# Altium PCB PCB1.PcbDoc (part 3 of 6)
Units mm, origin at the board's own origin, x right, y up, seen from the top; angles counter-clockwise.
Board outline 1473.2 x 504.06 mm, 4 copper layers (Top Layer, MidLayer1, MidLayer2, Bottom Layer); 162 components, 222 nets, 4894 pads, 2213 vias.
Unrouted connection lines stored in the file: 216.
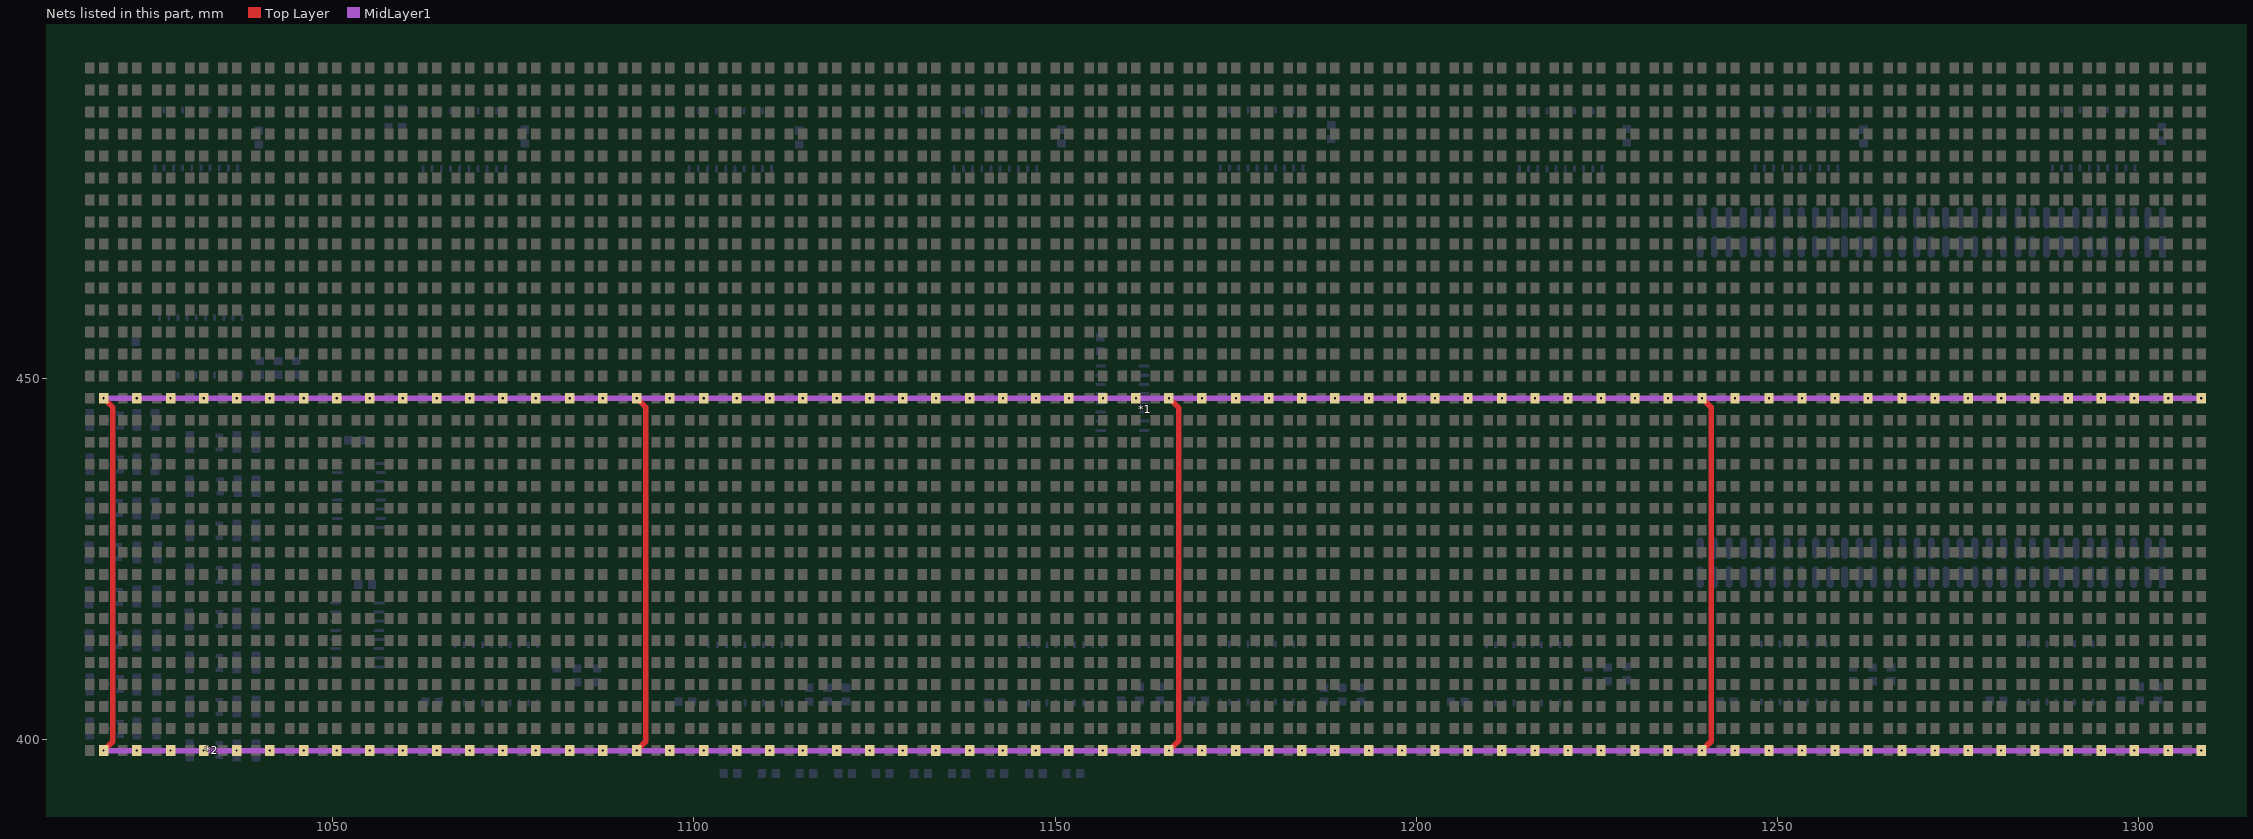
[diagram p5: the nets of this part, all layers, seen from the top]

## Footprints (in the part's own frame and the unit in brackets; to place one, negate y for a bottom-side part, rotate by r counter-clockwise, add the part's x,y. Pads: shape width x height; smd on the part's side, far side on the other; paste and mask are expansions set on the pad) (continued)
LED_3264 [mm] (continued)
  rect 1.3x1.5 smd: 75(-134.879,-64.389) 75(-134.879,-15.621) 75(-130.307,-64.389) 75(-130.307,-15.621) 75(-125.735,-64.389) 75(-125.735,-15.621) 75(-121.163,-64.389) 75(-121.163,-15.621) 75(-116.464,-64.389) 75(-116.464,-15.621) 75(-111.892,-64.389) 75(-111.892,-15.621) 75(-107.32,-64.389) 75(-107.32,-15.621) 75(-102.748,-64.389) 75(-102.748,-15.621) 75(-98.049,-64.389) 75(-98.049,-15.621) 75(-93.477,-64.389) 75(-93.477,-15.621) 75(-88.905,-64.389) 75(-88.905,-15.621) 75(-84.333,-64.389) 75(-84.333,-15.621) 75(-79.634,-64.389) 75(-79.634,-15.621) 75(-75.062,-64.389) 75(-75.062,-15.621) 75(-70.49,-64.389) 75(-70.49,-15.621) 75(-65.918,-64.389) 75(-65.918,-15.621) 75(-61.219,-64.389) 75(-61.219,-15.621) 75(-56.647,-64.389) 75(-56.647,-15.621) 75(-51.948,-64.389) 75(-51.948,-15.621) 75(-47.376,-64.389) 75(-47.376,-15.621) 75(-42.677,-64.389) 75(-42.677,-15.621) 75(-38.105,-64.389) 75(-38.105,-15.621) 75(-33.533,-64.389) 75(-33.533,-15.621) 75(-28.961,-64.389) 75(-28.961,-15.621) 75(-24.262,-64.389) 75(-24.262,-15.621) 75(-19.69,-64.389) 75(-19.69,-15.621) 75(-15.118,-64.389) 75(-15.118,-15.621) 75(-10.546,-64.389) 75(-10.546,-15.621) 75(-5.847,-64.389) 75(-5.847,-15.621) 75(-1.275,-64.389) 75(-1.275,-15.621) 75(3.297,-64.389) 75(3.297,-15.621) 75(7.869,-64.389) 75(7.869,-15.621) 75(12.568,-64.389) 75(12.568,-15.621) 75(17.14,-64.389) 75(17.14,-15.621) 76(-273.182,-61.341) 76(-273.182,-12.573) 76(-268.61,-61.341) 76(-268.61,-12.573) 76(-263.911,-61.341) 76(-263.911,-12.573) 76(-259.339,-61.341) 76(-259.339,-12.573) 76(-254.767,-61.341) 76(-254.767,-12.573) 76(-250.195,-61.341) 76(-250.195,-12.573) 76(-245.496,-61.341) 76(-245.496,-12.573) 76(-240.924,-61.341) 76(-240.924,-12.573) 76(-236.352,-61.341) 76(-236.352,-12.573) 76(-231.78,-61.341) 76(-231.78,-12.573) 76(-227.081,-61.341) 76(-227.081,-12.573) 76(-222.509,-61.341) 76(-222.509,-12.573) 76(-217.937,-61.341) 76(-217.937,-12.573) 76(-213.365,-61.341) 76(-213.365,-12.573) 76(-208.666,-61.341) 76(-208.666,-12.573) 76(-204.094,-61.341) 76(-204.094,-12.573) 76(-199.395,-61.341) 76(-199.395,-12.573) 76(-194.823,-61.341) 76(-194.823,-12.573) 76(-190.124,-61.341) 76(-190.124,-12.573) 76(-185.552,-61.341) 76(-185.552,-12.573) 76(-180.98,-61.341) 76(-180.98,-12.573) 76(-176.408,-61.341) 76(-176.408,-12.573) 76(-171.709,-61.341) 76(-171.709,-12.573) 76(-167.137,-61.341) 76(-167.137,-12.573) 76(-162.565,-61.341) 76(-162.565,-12.573) 76(-157.993,-61.341) 76(-157.993,-12.573) 76(-153.294,-61.341) 76(-153.294,-12.573) 76(-148.722,-61.341) 76(-148.722,-12.573) 76(-144.15,-61.341) 76(-144.15,-12.573) 76(-139.578,-61.341) 76(-139.578,-12.573) 76(-134.879,-61.341) 76(-134.879,-12.573) 76(-130.307,-61.341) 76(-130.307,-12.573) 76(-125.735,-61.341) 76(-125.735,-12.573) 76(-121.163,-61.341) 76(-121.163,-12.573) 76(-116.464,-61.341) 76(-116.464,-12.573) 76(-111.892,-61.341) 76(-111.892,-12.573) 76(-107.32,-61.341) 76(-107.32,-12.573) 76(-102.748,-61.341) 76(-102.748,-12.573) 76(-98.049,-61.341) 76(-98.049,-12.573) 76(-93.477,-61.341) 76(-93.477,-12.573) 76(-88.905,-61.341) 76(-88.905,-12.573) 76(-84.333,-61.341) 76(-84.333,-12.573) 76(-79.634,-61.341) 76(-79.634,-12.573) 76(-75.062,-61.341) 76(-75.062,-12.573) 76(-70.49,-61.341) 76(-70.49,-12.573) 76(-65.918,-61.341) 76(-65.918,-12.573) 76(-61.219,-61.341) 76(-61.219,-12.573) 76(-56.647,-61.341) 76(-56.647,-12.573) 76(-51.948,-61.341) 76(-51.948,-12.573) 76(-47.376,-61.341) 76(-47.376,-12.573) 76(-42.677,-61.341) 76(-42.677,-12.573) 76(-38.105,-61.341) 76(-38.105,-12.573) 76(-33.533,-61.341) 76(-33.533,-12.573) 76(-28.961,-61.341) 76(-28.961,-12.573) 76(-24.262,-61.341) 76(-24.262,-12.573) 76(-19.69,-61.341) 76(-19.69,-12.573) 76(-15.118,-61.341) 76(-15.118,-12.573) 76(-10.546,-61.341) 76(-10.546,-12.573) 76(-5.847,-61.341) 76(-5.847,-12.573) 76(-1.275,-61.341) 76(-1.275,-12.573) 76(3.297,-61.341) 76(3.297,-12.573) 76(7.869,-61.341) 76(7.869,-12.573) 76(12.568,-61.341) 76(12.568,-12.573) 76(17.14,-61.341) 76(17.14,-12.573) 77(-273.182,-58.293) 77(-273.182,-9.525) 77(-268.61,-58.293) 77(-268.61,-9.525) 77(-263.911,-58.293) 77(-263.911,-9.525) 77(-259.339,-58.293) 77(-259.339,-9.525) 77(-254.767,-58.293) 77(-254.767,-9.525) 77(-250.195,-58.293) 77(-250.195,-9.525) 77(-245.496,-58.293) 77(-245.496,-9.525) 77(-240.924,-58.293) 77(-240.924,-9.525) 77(-236.352,-58.293) 77(-236.352,-9.525) 77(-231.78,-58.293) 77(-231.78,-9.525) 77(-227.081,-58.293) 77(-227.081,-9.525) 77(-222.509,-58.293) 77(-222.509,-9.525) 77(-217.937,-58.293) 77(-217.937,-9.525) 77(-213.365,-58.293) 77(-213.365,-9.525) 77(-208.666,-58.293) 77(-208.666,-9.525) 77(-204.094,-58.293) 77(-204.094,-9.525) 77(-199.395,-58.293) 77(-199.395,-9.525) 77(-194.823,-58.293) 77(-194.823,-9.525) 77(-190.124,-58.293) 77(-190.124,-9.525) 77(-185.552,-58.293) 77(-185.552,-9.525) 77(-180.98,-58.293) 77(-180.98,-9.525) 77(-176.408,-58.293) 77(-176.408,-9.525) 77(-171.709,-58.293) 77(-171.709,-9.525) 77(-167.137,-58.293) 77(-167.137,-9.525) 77(-162.565,-58.293) 77(-162.565,-9.525) 77(-157.993,-58.293) 77(-157.993,-9.525) 77(-153.294,-58.293) 77(-153.294,-9.525) 77(-148.722,-58.293) 77(-148.722,-9.525) 77(-144.15,-58.293) 77(-144.15,-9.525) 77(-139.578,-58.293) 77(-139.578,-9.525) 77(-134.879,-58.293) 77(-134.879,-9.525) 77(-130.307,-58.293) 77(-130.307,-9.525) 77(-125.735,-58.293) 77(-125.735,-9.525) 77(-121.163,-58.293) 77(-121.163,-9.525) 77(-116.464,-58.293) 77(-116.464,-9.525) 77(-111.892,-58.293) 77(-111.892,-9.525) 77(-107.32,-58.293) 77(-107.32,-9.525) 77(-102.748,-58.293) 77(-102.748,-9.525) 77(-98.049,-58.293) 77(-98.049,-9.525) 77(-93.477,-58.293) 77(-93.477,-9.525) 77(-88.905,-58.293) 77(-88.905,-9.525) 77(-84.333,-58.293) 77(-84.333,-9.525) 77(-79.634,-58.293) 77(-79.634,-9.525) 77(-75.062,-58.293) 77(-75.062,-9.525) 77(-70.49,-58.293) 77(-70.49,-9.525) 77(-65.918,-58.293) 77(-65.918,-9.525) 77(-61.219,-58.293) 77(-61.219,-9.525) 77(-56.647,-58.293) 77(-56.647,-9.525) 77(-51.948,-58.293) 77(-51.948,-9.525) 77(-47.376,-58.293) 77(-47.376,-9.525) 77(-42.677,-58.293) 77(-42.677,-9.525) 77(-38.105,-58.293) 77(-38.105,-9.525) 77(-33.533,-58.293) 77(-33.533,-9.525) 77(-28.961,-58.293) 77(-28.961,-9.525) 77(-24.262,-58.293) 77(-24.262,-9.525) 77(-19.69,-58.293) 77(-19.69,-9.525) 77(-15.118,-58.293) 77(-15.118,-9.525) 77(-10.546,-58.293) 77(-10.546,-9.525) 77(-5.847,-58.293) 77(-5.847,-9.525) 77(-1.275,-58.293) 77(-1.275,-9.525) 77(3.297,-58.293) 77(3.297,-9.525) 77(7.869,-58.293) 77(7.869,-9.525) 77(12.568,-58.293) 77(12.568,-9.525) 77(17.14,-58.293) 77(17.14,-9.525) 78(-273.182,-55.245) 78(-273.182,-6.477) 78(-268.61,-55.245) 78(-268.61,-6.477) 78(-263.911,-55.245) 78(-263.911,-6.477) 78(-259.339,-55.245) 78(-259.339,-6.477) 78(-254.767,-55.245) 78(-254.767,-6.477) 78(-250.195,-55.245) 78(-250.195,-6.477) 78(-245.496,-55.245) 78(-245.496,-6.477) 78(-240.924,-55.245) 78(-240.924,-6.477) 78(-236.352,-55.245) 78(-236.352,-6.477) 78(-231.78,-55.245) 78(-231.78,-6.477) 78(-227.081,-55.245) 78(-227.081,-6.477) 78(-222.509,-55.245) 78(-222.509,-6.477) 78(-217.937,-55.245) 78(-217.937,-6.477) 78(-213.365,-55.245) 78(-213.365,-6.477) 78(-208.666,-55.245) 78(-208.666,-6.477) 78(-204.094,-55.245) 78(-204.094,-6.477) 78(-199.395,-55.245) 78(-199.395,-6.477) 78(-194.823,-55.245) 78(-194.823,-6.477) 78(-190.124,-55.245) 78(-190.124,-6.477) 78(-185.552,-55.245) 78(-185.552,-6.477) 78(-180.98,-55.245) 78(-180.98,-6.477) 78(-176.408,-55.245) 78(-176.408,-6.477) 78(-171.709,-55.245) 78(-171.709,-6.477) 78(-167.137,-55.245) 78(-167.137,-6.477) 78(-162.565,-55.245) 78(-162.565,-6.477) 78(-157.993,-55.245) 78(-157.993,-6.477) 78(-153.294,-55.245) 78(-153.294,-6.477) 78(-148.722,-55.245) 78(-148.722,-6.477) 78(-144.15,-55.245) 78(-144.15,-6.477) 78(-139.578,-55.245) 78(-139.578,-6.477) 78(-134.879,-55.245) 78(-134.879,-6.477) 78(-130.307,-55.245) 78(-130.307,-6.477) 78(-125.735,-55.245) 78(-125.735,-6.477) 78(-121.163,-55.245) 78(-121.163,-6.477) 78(-116.464,-55.245) 78(-116.464,-6.477) 78(-111.892,-55.245) 78(-111.892,-6.477) 78(-107.32,-55.245) 78(-107.32,-6.477) 78(-102.748,-55.245) 78(-102.748,-6.477) 78(-98.049,-55.245) 78(-98.049,-6.477) 78(-93.477,-55.245) 78(-93.477,-6.477) 78(-88.905,-55.245) 78(-88.905,-6.477) 78(-84.333,-55.245) 78(-84.333,-6.477) 78(-79.634,-55.245) 78(-79.634,-6.477) 78(-75.062,-55.245) 78(-75.062,-6.477) 78(-70.49,-55.245) 78(-70.49,-6.477) 78(-65.918,-55.245) 78(-65.918,-6.477) 78(-61.219,-55.245) 78(-61.219,-6.477) 78(-56.647,-55.245) 78(-56.647,-6.477) 78(-51.948,-55.245) 78(-51.948,-6.477) 78(-47.376,-55.245) 78(-47.376,-6.477) 78(-42.677,-55.245) 78(-42.677,-6.477) 78(-38.105,-55.245) 78(-38.105,-6.477) 78(-33.533,-55.245) 78(-33.533,-6.477) 78(-28.961,-55.245) 78(-28.961,-6.477) 78(-24.262,-55.245) 78(-24.262,-6.477) 78(-19.69,-55.245) 78(-19.69,-6.477) 78(-15.118,-55.245) 78(-15.118,-6.477) 78(-10.546,-55.245) 78(-10.546,-6.477) 78(-5.847,-55.245) 78(-5.847,-6.477) 78(-1.275,-55.245) 78(-1.275,-6.477) 78(3.297,-55.245) 78(3.297,-6.477) 78(7.869,-55.245) 78(7.869,-6.477) 78(12.568,-55.245) 78(12.568,-6.477) 78(17.14,-55.245) 78(17.14,-6.477) 79(-273.182,-52.197) 79(-273.182,-3.429) 79(-268.61,-52.197) 79(-268.61,-3.429) 79(-263.911,-52.197) 79(-263.911,-3.429) 79(-259.339,-52.197) 79(-259.339,-3.429) 79(-254.767,-52.197) 79(-254.767,-3.429) 79(-250.195,-52.197) 79(-250.195,-3.429) 79(-245.496,-52.197) 79(-245.496,-3.429) 79(-240.924,-52.197) 79(-240.924,-3.429) 79(-236.352,-52.197) 79(-236.352,-3.429) 79(-231.78,-52.197) 79(-231.78,-3.429) 79(-227.081,-52.197) 79(-227.081,-3.429) 79(-222.509,-52.197) 79(-222.509,-3.429) 79(-217.937,-52.197) 79(-217.937,-3.429) 79(-213.365,-52.197) 79(-213.365,-3.429) 79(-208.666,-52.197) 79(-208.666,-3.429) 79(-204.094,-52.197) 79(-204.094,-3.429) 79(-199.395,-52.197) 79(-199.395,-3.429) 79(-194.823,-52.197) 79(-194.823,-3.429) 79(-190.124,-52.197) 79(-190.124,-3.429) 79(-185.552,-52.197) 79(-185.552,-3.429) 79(-180.98,-52.197) 79(-180.98,-3.429) 79(-176.408,-52.197) 79(-176.408,-3.429) 79(-171.709,-52.197) 79(-171.709,-3.429) 79(-167.137,-52.197) 79(-167.137,-3.429) 79(-162.565,-52.197) 79(-162.565,-3.429) 79(-157.993,-52.197) 79(-157.993,-3.429) 79(-153.294,-52.197) 79(-153.294,-3.429) 79(-148.722,-52.197) 79(-148.722,-3.429) 79(-144.15,-52.197) 79(-144.15,-3.429) 79(-139.578,-52.197) 79(-139.578,-3.429) 79(-134.879,-52.197) 79(-134.879,-3.429) 79(-130.307,-52.197) 79(-130.307,-3.429) 79(-125.735,-52.197) 79(-125.735,-3.429) 79(-121.163,-52.197) 79(-121.163,-3.429) 79(-116.464,-52.197) 79(-116.464,-3.429) 79(-111.892,-52.197) 79(-111.892,-3.429) 79(-107.32,-52.197) 79(-107.32,-3.429) 79(-102.748,-52.197) 79(-102.748,-3.429) 79(-98.049,-52.197) 79(-98.049,-3.429) 79(-93.477,-52.197) 79(-93.477,-3.429) 79(-88.905,-52.197) 79(-88.905,-3.429) 79(-84.333,-52.197) 79(-84.333,-3.429) 79(-79.634,-52.197) 79(-79.634,-3.429) 79(-75.062,-52.197) 79(-75.062,-3.429) 79(-70.49,-52.197) 79(-70.49,-3.429) 79(-65.918,-52.197) 79(-65.918,-3.429) 79(-61.219,-52.197) 79(-61.219,-3.429) 79(-56.647,-52.197) 79(-56.647,-3.429) 79(-51.948,-52.197) 79(-51.948,-3.429) 79(-47.376,-52.197) 79(-47.376,-3.429) 79(-42.677,-52.197) 79(-42.677,-3.429) 79(-38.105,-52.197) 79(-38.105,-3.429) 79(-33.533,-52.197) 79(-33.533,-3.429) 79(-28.961,-52.197) 79(-28.961,-3.429) 79(-24.262,-52.197) 79(-24.262,-3.429) 79(-19.69,-52.197) 79(-19.69,-3.429) 79(-15.118,-52.197) 79(-15.118,-3.429) 79(-10.546,-52.197) 79(-10.546,-3.429) 79(-5.847,-52.197) 79(-5.847,-3.429) 79(-1.275,-52.197) 79(-1.275,-3.429) 79(3.297,-52.197) 79(3.297,-3.429) 79(7.869,-52.197) 79(7.869,-3.429) 79(12.568,-52.197) 79(12.568,-3.429) 79(17.14,-52.197) 79(17.14,-3.429) 80(-273.182,-49.149) 80(-273.182,-0.381) 80(-268.61,-49.149) 80(-268.61,-0.381) 80(-263.911,-49.149) 80(-263.911,-0.381) 80(-259.339,-49.149) 80(-259.339,-0.381) 80(-254.767,-49.149) 80(-254.767,-0.381) 80(-250.195,-49.149) 80(-250.195,-0.381) 80(-245.496,-49.149) 80(-245.496,-0.381) 80(-240.924,-49.149) 80(-240.924,-0.381) 80(-236.352,-49.149) 80(-236.352,-0.381) 80(-231.78,-49.149) 80(-231.78,-0.381) 80(-227.081,-49.149) 80(-227.081,-0.381) 80(-222.509,-49.149) 80(-222.509,-0.381) 80(-217.937,-49.149) 80(-217.937,-0.381) 80(-213.365,-49.149) 80(-213.365,-0.381) 80(-208.666,-49.149) 80(-208.666,-0.381) 80(-204.094,-49.149) 80(-204.094,-0.381) 80(-199.395,-49.149) 80(-199.395,-0.381) 80(-194.823,-49.149) 80(-194.823,-0.381) 80(-190.124,-49.149) 80(-190.124,-0.381) 80(-185.552,-49.149) 80(-185.552,-0.381) 80(-180.98,-49.149) 80(-180.98,-0.381) 80(-176.408,-49.149) 80(-176.408,-0.381) 80(-171.709,-49.149) 80(-171.709,-0.381) 80(-167.137,-49.149) 80(-167.137,-0.381) 80(-162.565,-49.149) 80(-162.565,-0.381) 80(-157.993,-49.149) 80(-157.993,-0.381) 80(-153.294,-49.149) 80(-153.294,-0.381) 80(-148.722,-49.149) 80(-148.722,-0.381) 80(-144.15,-49.149) 80(-144.15,-0.381) 80(-139.578,-49.149) 80(-139.578,-0.381) 80(-134.879,-49.149) 80(-134.879,-0.381) 80(-130.307,-49.149) 80(-130.307,-0.381) 80(-125.735,-49.149) 80(-125.735,-0.381) 80(-121.163,-49.149) 80(-121.163,-0.381) 80(-116.464,-49.149) 80(-116.464,-0.381) 80(-111.892,-49.149) 80(-111.892,-0.381) 80(-107.32,-49.149) 80(-107.32,-0.381) 80(-102.748,-49.149) 80(-102.748,-0.381) 80(-98.049,-49.149) 80(-98.049,-0.381) 80(-93.477,-49.149) 80(-93.477,-0.381) 80(-88.905,-49.149) 80(-88.905,-0.381) 80(-84.333,-49.149) 80(-84.333,-0.381) 80(-79.634,-49.149) 80(-79.634,-0.381) 80(-75.062,-49.149) 80(-75.062,-0.381) 80(-70.49,-49.149) 80(-70.49,-0.381) 80(-65.918,-49.149) 80(-65.918,-0.381) 80(-61.219,-49.149) 80(-61.219,-0.381) 80(-56.647,-49.149) 80(-56.647,-0.381) 80(-51.948,-49.149) 80(-51.948,-0.381) 80(-47.376,-49.149) 80(-47.376,-0.381) 80(-42.677,-49.149) 80(-42.677,-0.381) 80(-38.105,-49.149) 80(-38.105,-0.381) 80(-33.533,-49.149) 80(-33.533,-0.381) 80(-28.961,-49.149) 80(-28.961,-0.381) 80(-24.262,-49.149) 80(-24.262,-0.381) 80(-19.69,-49.149) 80(-19.69,-0.381) 80(-15.118,-49.149) 80(-15.118,-0.381) 80(-10.546,-49.149) 80(-10.546,-0.381) 80(-5.847,-49.149) 80(-5.847,-0.381) 80(-1.275,-49.149) 80(-1.275,-0.381) 80(3.297,-49.149) 80(3.297,-0.381) 80(7.869,-49.149) 80(7.869,-0.381) 80(12.568,-49.149) 80(12.568,-0.381) 80(17.14,-49.149) 80(17.14,-0.381) 81(-275.082,-46.101) 81(-275.082,-43.053) 81(-275.082,-40.005) 81(-275.082,-36.957) 81(-275.082,-33.909) 81(-275.082,-30.861) 81(-275.082,-27.813) 81(-275.082,-24.765) 81(-275.082,-21.717) 81(-275.082,-18.669) 81(-275.082,-15.621) 81(-275.082,-12.573) 81(-275.082,-9.525) 81(-275.082,-6.477) 81(-275.082,-3.429) 81(-275.082,-0.381) 82(-270.51,-46.101) 82(-270.51,-43.053) 82(-270.51,-40.005) 82(-270.51,-36.957) 82(-270.51,-33.909) 82(-270.51,-30.861) 82(-270.51,-27.813) 82(-270.51,-24.765) 82(-270.51,-21.717) 82(-270.51,-18.669) 82(-270.51,-15.621) 82(-270.51,-12.573) 82(-270.51,-9.525) 82(-270.51,-6.477) 82(-270.51,-3.429) 82(-270.51,-0.381) 83(-265.811,-46.101) 83(-265.811,-43.053) 83(-265.811,-40.005) 83(-265.811,-36.957) 83(-265.811,-33.909) 83(-265.811,-30.861) 83(-265.811,-27.813) 83(-265.811,-24.765) 83(-265.811,-21.717) 83(-265.811,-18.669) 83(-265.811,-15.621) 83(-265.811,-12.573) 83(-265.811,-9.525) 83(-265.811,-6.477) 83(-265.811,-3.429) 83(-265.811,-0.381) 84(-261.239,-46.101) 84(-261.239,-43.053) 84(-261.239,-40.005) 84(-261.239,-36.957) 84(-261.239,-33.909) 84(-261.239,-30.861) 84(-261.239,-27.813) 84(-261.239,-24.765) 84(-261.239,-21.717) 84(-261.239,-18.669) 84(-261.239,-15.621) 84(-261.239,-12.573) 84(-261.239,-9.525) 84(-261.239,-6.477) 84(-261.239,-3.429) 84(-261.239,-0.381) 85(-256.667,-46.101) 85(-256.667,-43.053) 85(-256.667,-40.005) 85(-256.667,-36.957) 85(-256.667,-33.909) 85(-256.667,-30.861) 85(-256.667,-27.813) 85(-256.667,-24.765) 85(-256.667,-21.717) 85(-256.667,-18.669) 85(-256.667,-15.621) 85(-256.667,-12.573) 85(-256.667,-9.525) 85(-256.667,-6.477) 85(-256.667,-3.429) 85(-256.667,-0.381) 86(-252.095,-46.101) 86(-252.095,-43.053) 86(-252.095,-40.005) 86(-252.095,-36.957) 86(-252.095,-33.909) 86(-252.095,-30.861) 86(-252.095,-27.813) 86(-252.095,-24.765) 86(-252.095,-21.717) 86(-252.095,-18.669) 86(-252.095,-15.621) 86(-252.095,-12.573) 86(-252.095,-9.525) 86(-252.095,-6.477) 86(-252.095,-3.429) 86(-252.095,-0.381) 87(-247.396,-46.101) 87(-247.396,-43.053) 87(-247.396,-40.005) 87(-247.396,-36.957) 87(-247.396,-33.909) 87(-247.396,-30.861) 87(-247.396,-27.813) 87(-247.396,-24.765) 87(-247.396,-21.717) 87(-247.396,-18.669) 87(-247.396,-15.621) 87(-247.396,-12.573) 87(-247.396,-9.525) 87(-247.396,-6.477) 87(-247.396,-3.429) 87(-247.396,-0.381) 88(-242.824,-46.101) 88(-242.824,-43.053) 88(-242.824,-40.005) 88(-242.824,-36.957) 88(-242.824,-33.909) 88(-242.824,-30.861) 88(-242.824,-27.813) 88(-242.824,-24.765) 88(-242.824,-21.717) 88(-242.824,-18.669) 88(-242.824,-15.621) 88(-242.824,-12.573) 88(-242.824,-9.525) 88(-242.824,-6.477) 88(-242.824,-3.429) 88(-242.824,-0.381) 89(-238.252,-46.101) 89(-238.252,-43.053) 89(-238.252,-40.005) 89(-238.252,-36.957) 89(-238.252,-33.909) 89(-238.252,-30.861) 89(-238.252,-27.813) 89(-238.252,-24.765) 89(-238.252,-21.717) 89(-238.252,-18.669) 89(-238.252,-15.621) 89(-238.252,-12.573) 89(-238.252,-9.525) 89(-238.252,-6.477) 89(-238.252,-3.429) 89(-238.252,-0.381) 90(-233.68,-46.101) 90(-233.68,-43.053) 90(-233.68,-40.005) 90(-233.68,-36.957) 90(-233.68,-33.909) 90(-233.68,-30.861) 90(-233.68,-27.813) 90(-233.68,-24.765) 90(-233.68,-21.717) 90(-233.68,-18.669) 90(-233.68,-15.621) 90(-233.68,-12.573) 90(-233.68,-9.525) 90(-233.68,-6.477) 90(-233.68,-3.429) 90(-233.68,-0.381) 91(-228.981,-46.101) 91(-228.981,-43.053) 91(-228.981,-40.005) 91(-228.981,-36.957) 91(-228.981,-33.909) 91(-228.981,-30.861) 91(-228.981,-27.813) 91(-228.981,-24.765) 91(-228.981,-21.717) 91(-228.981,-18.669) 91(-228.981,-15.621) 91(-228.981,-12.573) 91(-228.981,-9.525) 91(-228.981,-6.477) 91(-228.981,-3.429) 91(-228.981,-0.381) 92(-224.409,-46.101) 92(-224.409,-43.053) 92(-224.409,-40.005) 92(-224.409,-36.957) 92(-224.409,-33.909) 92(-224.409,-30.861) 92(-224.409,-27.813) 92(-224.409,-24.765) 92(-224.409,-21.717) 92(-224.409,-18.669) 92(-224.409,-15.621) 92(-224.409,-12.573) 92(-224.409,-9.525) 92(-224.409,-6.477) 92(-224.409,-3.429) 92(-224.409,-0.381) 93(-219.837,-46.101) 93(-219.837,-43.053) 93(-219.837,-40.005) 93(-219.837,-36.957) 93(-219.837,-33.909) 93(-219.837,-30.861) 93(-219.837,-27.813) 93(-219.837,-24.765) 93(-219.837,-21.717) 93(-219.837,-18.669) 93(-219.837,-15.621) 93(-219.837,-12.573) 93(-219.837,-9.525) 93(-219.837,-6.477) 93(-219.837,-3.429) 93(-219.837,-0.381) 94(-215.265,-46.101) 94(-215.265,-43.053) 94(-215.265,-40.005) 94(-215.265,-36.957) 94(-215.265,-33.909) 94(-215.265,-30.861) 94(-215.265,-27.813) 94(-215.265,-24.765) 94(-215.265,-21.717) 94(-215.265,-18.669) 94(-215.265,-15.621) 94(-215.265,-12.573) 94(-215.265,-9.525) 94(-215.265,-6.477) 94(-215.265,-3.429) 94(-215.265,-0.381) 95(-210.566,-46.101) 95(-210.566,-43.053) 95(-210.566,-40.005) 95(-210.566,-36.957) 95(-210.566,-33.909) 95(-210.566,-30.861) 95(-210.566,-27.813) 95(-210.566,-24.765) 95(-210.566,-21.717) 95(-210.566,-18.669) 95(-210.566,-15.621) 95(-210.566,-12.573) 95(-210.566,-9.525) 95(-210.566,-6.477) 95(-210.566,-3.429) 95(-210.566,-0.381) 96(-205.994,-46.101) 96(-205.994,-43.053) 96(-205.994,-40.005) 96(-205.994,-36.957) 96(-205.994,-33.909) 96(-205.994,-30.861) 96(-205.994,-27.813) 96(-205.994,-24.765) 96(-205.994,-21.717) 96(-205.994,-18.669) 96(-205.994,-15.621) 96(-205.994,-12.573) 96(-205.994,-9.525) 96(-205.994,-6.477) 96(-205.994,-3.429) 96(-205.994,-0.381) 97(-201.295,-46.101) 97(-201.295,-43.053) 97(-201.295,-40.005) 97(-201.295,-36.957) 97(-201.295,-33.909) 97(-201.295,-30.861) 97(-201.295,-27.813) 97(-201.295,-24.765) 97(-201.295,-21.717) 97(-201.295,-18.669) 97(-201.295,-15.621) 97(-201.295,-12.573) 97(-201.295,-9.525) 97(-201.295,-6.477) 97(-201.295,-3.429) 97(-201.295,-0.381) 98(-196.723,-46.101) 98(-196.723,-43.053) 98(-196.723,-40.005) 98(-196.723,-36.957) 98(-196.723,-33.909) 98(-196.723,-30.861) 98(-196.723,-27.813) 98(-196.723,-24.765) 98(-196.723,-21.717) 98(-196.723,-18.669) 98(-196.723,-15.621) 98(-196.723,-12.573) 98(-196.723,-9.525) 98(-196.723,-6.477) 98(-196.723,-3.429) 98(-196.723,-0.381) 99(-192.024,-46.101) 99(-192.024,-43.053) 99(-192.024,-40.005) 99(-192.024,-36.957) 99(-192.024,-33.909) 99(-192.024,-30.861) 99(-192.024,-27.813) 99(-192.024,-24.765) 99(-192.024,-21.717) 99(-192.024,-18.669) 99(-192.024,-15.621) 99(-192.024,-12.573) 99(-192.024,-9.525) 99(-192.024,-6.477) 99(-192.024,-3.429) 99(-192.024,-0.381) 100(-187.452,-46.101) 100(-187.452,-43.053) 100(-187.452,-40.005) 100(-187.452,-36.957) 100(-187.452,-33.909) 100(-187.452,-30.861) 100(-187.452,-27.813) 100(-187.452,-24.765) 100(-187.452,-21.717) 100(-187.452,-18.669) 100(-187.452,-15.621) 100(-187.452,-12.573) 100(-187.452,-9.525) 100(-187.452,-6.477) 100(-187.452,-3.429) 100(-187.452,-0.381) 101(-182.88,-46.101) 101(-182.88,-43.053) 101(-182.88,-40.005) 101(-182.88,-36.957) 101(-182.88,-33.909) 101(-182.88,-30.861) 101(-182.88,-27.813) 101(-182.88,-24.765) 101(-182.88,-21.717) 101(-182.88,-18.669) 101(-182.88,-15.621) 101(-182.88,-12.573) 101(-182.88,-9.525) 101(-182.88,-6.477) 101(-182.88,-3.429) 101(-182.88,-0.381) 102(-178.308,-46.101) 102(-178.308,-43.053) 102(-178.308,-40.005) 102(-178.308,-36.957) 102(-178.308,-33.909) 102(-178.308,-30.861) 102(-178.308,-27.813) 102(-178.308,-24.765) 102(-178.308,-21.717) 102(-178.308,-18.669) 102(-178.308,-15.621) 102(-178.308,-12.573) 102(-178.308,-9.525) 102(-178.308,-6.477) 102(-178.308,-3.429) 102(-178.308,-0.381) 103(-173.609,-46.101) 103(-173.609,-43.053) 103(-173.609,-40.005) 103(-173.609,-36.957) 103(-173.609,-33.909) 103(-173.609,-30.861) 103(-173.609,-27.813) 103(-173.609,-24.765) 103(-173.609,-21.717) 103(-173.609,-18.669) 103(-173.609,-15.621) 103(-173.609,-12.573) 103(-173.609,-9.525) 103(-173.609,-6.477) 103(-173.609,-3.429) 103(-173.609,-0.381) 104(-169.037,-46.101) 104(-169.037,-43.053) 104(-169.037,-40.005) 104(-169.037,-36.957) 104(-169.037,-33.909) 104(-169.037,-30.861) 104(-169.037,-27.813) 104(-169.037,-24.765) 104(-169.037,-21.717) 104(-169.037,-18.669) 104(-169.037,-15.621) 104(-169.037,-12.573) 104(-169.037,-9.525) 104(-169.037,-6.477) 104(-169.037,-3.429) 104(-169.037,-0.381) 105(-164.465,-46.101) 105(-164.465,-43.053) 105(-164.465,-40.005) 105(-164.465,-36.957) 105(-164.465,-33.909) 105(-164.465,-30.861) 105(-164.465,-27.813) 105(-164.465,-24.765) 105(-164.465,-21.717) 105(-164.465,-18.669) 105(-164.465,-15.621) 105(-164.465,-12.573) 105(-164.465,-9.525) 105(-164.465,-6.477) 105(-164.465,-3.429) 105(-164.465,-0.381) 106(-159.893,-46.101) 106(-159.893,-43.053) 106(-159.893,-40.005) 106(-159.893,-36.957) 106(-159.893,-33.909) 106(-159.893,-30.861) 106(-159.893,-27.813) 106(-159.893,-24.765) 106(-159.893,-21.717) 106(-159.893,-18.669) 106(-159.893,-15.621) 106(-159.893,-12.573) 106(-159.893,-9.525) 106(-159.893,-6.477) 106(-159.893,-3.429) 106(-159.893,-0.381) 107(-155.194,-46.101) 107(-155.194,-43.053) 107(-155.194,-40.005) 107(-155.194,-36.957) 107(-155.194,-33.909) 107(-155.194,-30.861) 107(-155.194,-27.813) 107(-155.194,-24.765) 107(-155.194,-21.717) 107(-155.194,-18.669) 107(-155.194,-15.621) 107(-155.194,-12.573) 107(-155.194,-9.525) 107(-155.194,-6.477) 107(-155.194,-3.429) 107(-155.194,-0.381) 108(-150.622,-46.101) 108(-150.622,-43.053) 108(-150.622,-40.005) 108(-150.622,-36.957) 108(-150.622,-33.909) 108(-150.622,-30.861) 108(-150.622,-27.813) 108(-150.622,-24.765) 108(-150.622,-21.717) 108(-150.622,-18.669) 108(-150.622,-15.621) 108(-150.622,-12.573) 108(-150.622,-9.525) 108(-150.622,-6.477) 108(-150.622,-3.429) 108(-150.622,-0.381) 109(-146.05,-46.101) 109(-146.05,-43.053) 109(-146.05,-40.005) 109(-146.05,-36.957) 109(-146.05,-33.909) 109(-146.05,-30.861) 109(-146.05,-27.813) 109(-146.05,-24.765) 109(-146.05,-21.717) 109(-146.05,-18.669) 109(-146.05,-15.621) 109(-146.05,-12.573) 109(-146.05,-9.525) 109(-146.05,-6.477) 109(-146.05,-3.429) 109(-146.05,-0.381) 110(-141.478,-46.101) 110(-141.478,-43.053) 110(-141.478,-40.005) 110(-141.478,-36.957) 110(-141.478,-33.909) 110(-141.478,-30.861) 110(-141.478,-27.813) 110(-141.478,-24.765) 110(-141.478,-21.717) 110(-141.478,-18.669) 110(-141.478,-15.621) 110(-141.478,-12.573) 110(-141.478,-9.525) 110(-141.478,-6.477) 110(-141.478,-3.429) 110(-141.478,-0.381) 111(-136.779,-46.101) 111(-136.779,-43.053) 111(-136.779,-40.005) 111(-136.779,-36.957) 111(-136.779,-33.909) 111(-136.779,-30.861) 111(-136.779,-27.813) 111(-136.779,-24.765) 111(-136.779,-21.717) 111(-136.779,-18.669) 111(-136.779,-15.621) 111(-136.779,-12.573) 111(-136.779,-9.525) 111(-136.779,-6.477) 111(-136.779,-3.429) 111(-136.779,-0.381) 112(-132.207,-46.101) 112(-132.207,-43.053) 112(-132.207,-40.005) 112(-132.207,-36.957) 112(-132.207,-33.909) 112(-132.207,-30.861) 112(-132.207,-27.813) 112(-132.207,-24.765) 112(-132.207,-21.717) 112(-132.207,-18.669) 112(-132.207,-15.621) 112(-132.207,-12.573) 112(-132.207,-9.525) 112(-132.207,-6.477) 112(-132.207,-3.429) 112(-132.207,-0.381) 113(-127.635,-46.101) 113(-127.635,-43.053) 113(-127.635,-40.005) 113(-127.635,-36.957) 113(-127.635,-33.909) 113(-127.635,-30.861) 113(-127.635,-27.813) 113(-127.635,-24.765) 113(-127.635,-21.717) 113(-127.635,-18.669) 113(-127.635,-15.621) 113(-127.635,-12.573) 113(-127.635,-9.525) 113(-127.635,-6.477) 113(-127.635,-3.429) 113(-127.635,-0.381) 114(-123.063,-46.101) 114(-123.063,-43.053) 114(-123.063,-40.005) 114(-123.063,-36.957) 114(-123.063,-33.909) 114(-123.063,-30.861) 114(-123.063,-27.813) 114(-123.063,-24.765) 114(-123.063,-21.717) 114(-123.063,-18.669) 114(-123.063,-15.621) 114(-123.063,-12.573) 114(-123.063,-9.525) 114(-123.063,-6.477) 114(-123.063,-3.429) 114(-123.063,-0.381) 115(-118.364,-46.101) 115(-118.364,-43.053) 115(-118.364,-40.005) 115(-118.364,-36.957) 115(-118.364,-33.909) 115(-118.364,-30.861) 115(-118.364,-27.813) 115(-118.364,-24.765) 115(-118.364,-21.717) 115(-118.364,-18.669) 115(-118.364,-15.621) 115(-118.364,-12.573) 115(-118.364,-9.525) 115(-118.364,-6.477) 115(-118.364,-3.429) 115(-118.364,-0.381) 116(-113.792,-46.101) 116(-113.792,-43.053) 116(-113.792,-40.005) 116(-113.792,-36.957) 116(-113.792,-33.909) 116(-113.792,-30.861) 116(-113.792,-27.813) 116(-113.792,-24.765) 116(-113.792,-21.717) 116(-113.792,-18.669) 116(-113.792,-15.621) 116(-113.792,-12.573) 116(-113.792,-9.525) 116(-113.792,-6.477) 116(-113.792,-3.429) 116(-113.792,-0.381) 117(-109.22,-46.101) 117(-109.22,-43.053) 117(-109.22,-40.005) 117(-109.22,-36.957) 117(-109.22,-33.909) 117(-109.22,-30.861) 117(-109.22,-27.813) 117(-109.22,-24.765) 117(-109.22,-21.717) 117(-109.22,-18.669) 117(-109.22,-15.621) 117(-109.22,-12.573) 117(-109.22,-9.525) 117(-109.22,-6.477) 117(-109.22,-3.429) 117(-109.22,-0.381) 118(-104.648,-46.101) 118(-104.648,-43.053) 118(-104.648,-40.005) 118(-104.648,-36.957) 118(-104.648,-33.909) 118(-104.648,-30.861) 118(-104.648,-27.813) 118(-104.648,-24.765) 118(-104.648,-21.717) 118(-104.648,-18.669) 118(-104.648,-15.621) 118(-104.648,-12.573) 118(-104.648,-9.525) 118(-104.648,-6.477) 118(-104.648,-3.429) 118(-104.648,-0.381) 119(-99.949,-46.101) 119(-99.949,-43.053) 119(-99.949,-40.005) 119(-99.949,-36.957) 119(-99.949,-33.909) 119(-99.949,-30.861) 119(-99.949,-27.813) 119(-99.949,-24.765) 119(-99.949,-21.717) 119(-99.949,-18.669) 119(-99.949,-15.621) 119(-99.949,-12.573) 119(-99.949,-9.525) 119(-99.949,-6.477) 119(-99.949,-3.429) 119(-99.949,-0.381) 120(-95.377,-46.101) 120(-95.377,-43.053) 120(-95.377,-40.005) 120(-95.377,-36.957) 120(-95.377,-33.909) 120(-95.377,-30.861) 120(-95.377,-27.813) 120(-95.377,-24.765) 120(-95.377,-21.717) 120(-95.377,-18.669) 120(-95.377,-15.621) 120(-95.377,-12.573) 120(-95.377,-9.525) 120(-95.377,-6.477) 120(-95.377,-3.429) 120(-95.377,-0.381) 121(-90.805,-46.101) 121(-90.805,-43.053) 121(-90.805,-40.005) 121(-90.805,-36.957) 121(-90.805,-33.909) 121(-90.805,-30.861) 121(-90.805,-27.813) 121(-90.805,-24.765) 121(-90.805,-21.717) 121(-90.805,-18.669) 121(-90.805,-15.621) 121(-90.805,-12.573) 121(-90.805,-9.525) 121(-90.805,-6.477) 121(-90.805,-3.429) 121(-90.805,-0.381) 122(-86.233,-46.101) 122(-86.233,-43.053) 122(-86.233,-40.005) 122(-86.233,-36.957) 122(-86.233,-33.909) 122(-86.233,-30.861) 122(-86.233,-27.813) 122(-86.233,-24.765) 122(-86.233,-21.717) 122(-86.233,-18.669) 122(-86.233,-15.621) 122(-86.233,-12.573) 122(-86.233,-9.525) 122(-86.233,-6.477) 122(-86.233,-3.429) 122(-86.233,-0.381) 123(-81.534,-46.101) 123(-81.534,-43.053) 123(-81.534,-40.005) 123(-81.534,-36.957) 123(-81.534,-33.909) 123(-81.534,-30.861) 123(-81.534,-27.813) 123(-81.534,-24.765) 123(-81.534,-21.717) 123(-81.534,-18.669) 123(-81.534,-15.621) 123(-81.534,-12.573) 123(-81.534,-9.525) 123(-81.534,-6.477) 123(-81.534,-3.429) 123(-81.534,-0.381) 124(-76.962,-46.101) 124(-76.962,-43.053) 124(-76.962,-40.005) 124(-76.962,-36.957) 124(-76.962,-33.909) 124(-76.962,-30.861) 124(-76.962,-27.813) 124(-76.962,-24.765) 124(-76.962,-21.717) 124(-76.962,-18.669) 124(-76.962,-15.621) 124(-76.962,-12.573) 124(-76.962,-9.525) 124(-76.962,-6.477) 124(-76.962,-3.429) 124(-76.962,-0.381) 125(-72.39,-46.101) 125(-72.39,-43.053) 125(-72.39,-40.005) 125(-72.39,-36.957) 125(-72.39,-33.909) 125(-72.39,-30.861) 125(-72.39,-27.813) 125(-72.39,-24.765) 125(-72.39,-21.717) 125(-72.39,-18.669) 125(-72.39,-15.621) 125(-72.39,-12.573) 125(-72.39,-9.525) 125(-72.39,-6.477) 125(-72.39,-3.429) 125(-72.39,-0.381) 126(-67.818,-46.101) 126(-67.818,-43.053) 126(-67.818,-40.005) 126(-67.818,-36.957) 126(-67.818,-33.909) 126(-67.818,-30.861) 126(-67.818,-27.813) 126(-67.818,-24.765) 126(-67.818,-21.717) 126(-67.818,-18.669) 126(-67.818,-15.621) 126(-67.818,-12.573) 126(-67.818,-9.525) 126(-67.818,-6.477) 126(-67.818,-3.429) 126(-67.818,-0.381) 127(-63.119,-46.101) 127(-63.119,-43.053) 127(-63.119,-40.005) 127(-63.119,-36.957) 127(-63.119,-33.909) 127(-63.119,-30.861) 127(-63.119,-27.813) 127(-63.119,-24.765) 127(-63.119,-21.717) 127(-63.119,-18.669) 127(-63.119,-15.621) 127(-63.119,-12.573) 127(-63.119,-9.525) 127(-63.119,-6.477) 127(-63.119,-3.429) 127(-63.119,-0.381) 128(-58.547,-46.101) 128(-58.547,-43.053) 128(-58.547,-40.005) 128(-58.547,-36.957) 128(-58.547,-33.909) 128(-58.547,-30.861) 128(-58.547,-27.813) 128(-58.547,-24.765) 128(-58.547,-21.717) 128(-58.547,-18.669) 128(-58.547,-15.621) 128(-58.547,-12.573) 128(-58.547,-9.525) 128(-58.547,-6.477) 128(-58.547,-3.429) 128(-58.547,-0.381) 129(-53.848,-46.101) 129(-53.848,-43.053) 129(-53.848,-40.005) 129(-53.848,-36.957) 129(-53.848,-33.909) 129(-53.848,-30.861) 129(-53.848,-27.813) 129(-53.848,-24.765) 129(-53.848,-21.717) 129(-53.848,-18.669) 129(-53.848,-15.621) 129(-53.848,-12.573) 129(-53.848,-9.525) 129(-53.848,-6.477) 129(-53.848,-3.429) 129(-53.848,-0.381) 130(-49.276,-46.101) 130(-49.276,-43.053) 130(-49.276,-40.005) 130(-49.276,-36.957) 130(-49.276,-33.909) 130(-49.276,-30.861) 130(-49.276,-27.813) 130(-49.276,-24.765) 130(-49.276,-21.717) 130(-49.276,-18.669) 130(-49.276,-15.621) 130(-49.276,-12.573) 130(-49.276,-9.525) 130(-49.276,-6.477) 130(-49.276,-3.429) 130(-49.276,-0.381) 131(-44.577,-46.101) 131(-44.577,-43.053) 131(-44.577,-40.005) 131(-44.577,-36.957) 131(-44.577,-33.909) 131(-44.577,-30.861) 131(-44.577,-27.813) 131(-44.577,-24.765) 131(-44.577,-21.717) 131(-44.577,-18.669) 131(-44.577,-15.621) 131(-44.577,-12.573) 131(-44.577,-9.525) 131(-44.577,-6.477) 131(-44.577,-3.429) 131(-44.577,-0.381) 132(-40.005,-46.101) 132(-40.005,-43.053) 132(-40.005,-40.005) 132(-40.005,-36.957) 132(-40.005,-33.909) 132(-40.005,-30.861) 132(-40.005,-27.813) 132(-40.005,-24.765) 132(-40.005,-21.717) 132(-40.005,-18.669) 132(-40.005,-15.621) 132(-40.005,-12.573) 132(-40.005,-9.525) 132(-40.005,-6.477) 132(-40.005,-3.429) 132(-40.005,-0.381) 133(-35.433,-46.101) 133(-35.433,-43.053) 133(-35.433,-40.005) 133(-35.433,-36.957) 133(-35.433,-33.909) 133(-35.433,-30.861) 133(-35.433,-27.813) 133(-35.433,-24.765) 133(-35.433,-21.717) 133(-35.433,-18.669) 133(-35.433,-15.621) 133(-35.433,-12.573) 133(-35.433,-9.525) 133(-35.433,-6.477) 133(-35.433,-3.429) 133(-35.433,-0.381) 134(-30.861,-46.101) 134(-30.861,-43.053) 134(-30.861,-40.005) 134(-30.861,-36.957) 134(-30.861,-33.909) 134(-30.861,-30.861) 134(-30.861,-27.813) 134(-30.861,-24.765) 134(-30.861,-21.717) 134(-30.861,-18.669) 134(-30.861,-15.621) 134(-30.861,-12.573) 134(-30.861,-9.525) 134(-30.861,-6.477) 134(-30.861,-3.429) 134(-30.861,-0.381) 135(-26.162,-46.101) 135(-26.162,-43.053) 135(-26.162,-40.005) 135(-26.162,-36.957) 135(-26.162,-33.909) 135(-26.162,-30.861) 135(-26.162,-27.813) 135(-26.162,-24.765) 135(-26.162,-21.717) 135(-26.162,-18.669) 135(-26.162,-15.621) 135(-26.162,-12.573) 135(-26.162,-9.525) 135(-26.162,-6.477) 135(-26.162,-3.429) 135(-26.162,-0.381) 136(-21.59,-46.101) 136(-21.59,-43.053) 136(-21.59,-40.005) 136(-21.59,-36.957) 136(-21.59,-33.909) 136(-21.59,-30.861) 136(-21.59,-27.813) 136(-21.59,-24.765) 136(-21.59,-21.717) 136(-21.59,-18.669) 136(-21.59,-15.621) 136(-21.59,-12.573) 136(-21.59,-9.525) 136(-21.59,-6.477) 136(-21.59,-3.429) 136(-21.59,-0.381) 137(-17.018,-46.101) 137(-17.018,-43.053) 137(-17.018,-40.005) 137(-17.018,-36.957) 137(-17.018,-33.909) 137(-17.018,-30.861) 137(-17.018,-27.813) 137(-17.018,-24.765) 137(-17.018,-21.717) 137(-17.018,-18.669) 137(-17.018,-15.621) 137(-17.018,-12.573) 137(-17.018,-9.525) 137(-17.018,-6.477) 137(-17.018,-3.429) 137(-17.018,-0.381) 138(-12.446,-46.101) 138(-12.446,-43.053) 138(-12.446,-40.005) 138(-12.446,-36.957) 138(-12.446,-33.909) 138(-12.446,-30.861) 138(-12.446,-27.813) 138(-12.446,-24.765) 138(-12.446,-21.717) 138(-12.446,-18.669) 138(-12.446,-15.621) 138(-12.446,-12.573) 138(-12.446,-9.525) 138(-12.446,-6.477) 138(-12.446,-3.429) 138(-12.446,-0.381) 139(-7.747,-46.101) 139(-7.747,-43.053) 139(-7.747,-40.005) 139(-7.747,-36.957) 139(-7.747,-33.909) 139(-7.747,-30.861) 139(-7.747,-27.813) 139(-7.747,-24.765) 139(-7.747,-21.717) 139(-7.747,-18.669) 139(-7.747,-15.621) 139(-7.747,-12.573) 139(-7.747,-9.525) 139(-7.747,-6.477) 139(-7.747,-3.429) 139(-7.747,-0.381) 140(-3.175,-46.101) 140(-3.175,-43.053) 140(-3.175,-40.005) 140(-3.175,-36.957) 140(-3.175,-33.909) 140(-3.175,-30.861) 140(-3.175,-27.813) 140(-3.175,-24.765) 140(-3.175,-21.717) 140(-3.175,-18.669) 140(-3.175,-15.621) 140(-3.175,-12.573) 140(-3.175,-9.525) 140(-3.175,-6.477) 140(-3.175,-3.429) 140(-3.175,-0.381) 141(1.397,-46.101) 141(1.397,-43.053) 141(1.397,-40.005) 141(1.397,-36.957) 141(1.397,-33.909) 141(1.397,-30.861) 141(1.397,-27.813) 141(1.397,-24.765) 141(1.397,-21.717) 141(1.397,-18.669) 141(1.397,-15.621) 141(1.397,-12.573) 141(1.397,-9.525) 141(1.397,-6.477) 141(1.397,-3.429) 141(1.397,-0.381) 142(5.969,-46.101) 142(5.969,-43.053) 142(5.969,-40.005) 142(5.969,-36.957) 142(5.969,-33.909) 142(5.969,-30.861) 142(5.969,-27.813) 142(5.969,-24.765) 142(5.969,-21.717) 142(5.969,-18.669) 142(5.969,-15.621) 142(5.969,-12.573) 142(5.969,-9.525) 142(5.969,-6.477) 142(5.969,-3.429) 142(5.969,-0.381) 143(10.668,-46.101) 143(10.668,-43.053) 143(10.668,-40.005) 143(10.668,-36.957) 143(10.668,-33.909) 143(10.668,-30.861) 143(10.668,-27.813) 143(10.668,-24.765) 143(10.668,-21.717) 143(10.668,-18.669) 143(10.668,-15.621) 143(10.668,-12.573) 143(10.668,-9.525) 143(10.668,-6.477) 143(10.668,-3.429) 143(10.668,-0.381) 144(15.24,-46.101) 144(15.24,-43.053) 144(15.24,-40.005) 144(15.24,-36.957) 144(15.24,-33.909) 144(15.24,-30.861) 144(15.24,-27.813) 144(15.24,-24.765) 144(15.24,-21.717) 144(15.24,-18.669) 144(15.24,-15.621) 144(15.24,-12.573) 144(15.24,-9.525) 144(15.24,-6.477) 144(15.24,-3.429) 144(15.24,-0.381)
  silkscreen extent -276.03,-96.01 18.11,0.76
MC74AC138 [mm]
  rect 1.5x0.42 smd: 1(0,0)
  oval 1.5x0.42 smd: 2(0,-1.27) 3(0,-2.54) 4(0,-3.81) 5(0,-5.08) 6(0,-6.35) 7(0,-7.62) 8(0,-8.89) 9(6,-8.89) 10(6,-7.62) 11(6,-6.35) 12(6,-5.08) 13(6,-3.81) 14(6,-2.54) 15(6,-1.27) 16(6,0)
  silkscreen extent 1.58,-9.53 4.42,0.63
SN74LVTH574 [mm]
  rect 1x0.4 smd: 1(0,0)
  oval 1x0.4 smd: 2(0,-1.27) 3(0,-2.54) 4(0,-3.81) 5(0,-5.08) 6(0,-6.35) 7(0,-7.62) 8(0,-8.89) 9(0,-10.16) 10(0,-11.43) 11(8,-11.43) 12(8,-10.16) 13(8,-8.89) 14(8,-7.62) 15(8,-6.35) 16(8,-5.08) 17(8,-3.81) 18(8,-2.54) 19(8,-1.27) 20(8,0)
  silkscreen extent 1.33,-12.06 6.67,0.63
STM32F407ZET6 [mm]
  rect 3x1 smd: 1(-24.638,31.877) 67(21.082,31.845)
  oval 3x1 smd: 2(-24.638,29.877) 3(-24.638,27.877) 4(-24.638,25.877) 5(-24.638,23.877) 6(-24.638,21.877) 7(-24.638,19.877) 8(-24.638,17.877) 9(-24.638,15.877) 10(-24.638,13.877) 11(-24.638,11.877) 12(-24.638,9.877) 13(-24.638,7.877) 14(-24.638,5.877) 15(-24.638,3.877) 16(-24.638,1.877) 17(-24.638,-0.123) 18(-24.638,-2.123) 19(-24.638,-4.123) 20(-24.638,-6.123) 21(-24.638,-8.123) 22(-24.638,-10.123) 23(-24.638,-12.123) 24(-24.638,-14.123) 25(-24.638,-16.123) 26(-24.638,-18.123) 27(-24.638,-20.123) 28(-24.638,-22.123) 29(-24.638,-24.123) 30(-24.638,-26.123) 31(-24.638,-28.123) 32(-24.638,-30.123) 33(-24.638,-32.123) 34(-20.638,-32.123) 35(-20.638,-30.123) 36(-20.638,-28.123) 37(-20.638,-26.123) 38(-20.638,-24.123) 39(-20.638,-22.123) 40(-20.638,-20.123) 41(-20.638,-18.123) 42(-20.638,-16.123) 43(-20.638,-14.123) 44(-20.638,-12.123) 45(-20.638,-10.123) 46(-20.638,-8.123) 47(-20.638,-6.123) 48(-20.638,-4.123) 49(-20.638,-2.123) 50(-20.638,-0.123) 51(-20.638,1.877) 52(-20.638,3.877) 53(-20.638,5.877) 54(-20.638,7.877) 55(-20.638,9.877) 56(-20.638,11.877) 57(-20.638,13.877) 58(-20.638,15.877) 59(-20.638,17.877) 60(-20.638,19.877) 61(-20.638,21.877) 62(-20.638,23.877) 63(-20.638,25.877) 64(-20.638,27.877) 65(-20.638,29.877) 66(-20.638,31.877) 68(21.082,29.845) 69(21.082,27.845) 70(21.082,25.845) 71(21.082,23.845) 72(21.082,21.845) 73(21.082,19.845) 74(21.082,17.845) 75(21.082,15.845) 76(21.082,13.845) 77(21.082,11.845) 78(21.082,9.845) 79(21.082,7.845) 80(21.082,5.845) 81(21.082,3.845) 82(21.082,1.845) 83(21.082,-0.155) 84(21.082,-2.155) 85(21.082,-4.155) 86(21.082,-6.155) 87(21.082,-8.155) 88(21.082,-10.155) 89(21.082,-12.155) 90(21.082,-14.155) 91(21.082,-16.155) 92(21.082,-18.155) 93(21.082,-20.155) 94(21.082,-22.155) 95(21.082,-24.155) 96(21.082,-26.155) 97(21.082,-28.155) 98(21.082,-30.155) 99(21.082,-32.155) 100(25.082,-32.155) 101(25.082,-30.155) 102(25.082,-28.155) 103(25.082,-26.155) 104(25.082,-24.155) 105(25.082,-22.155) 106(25.082,-20.155) 107(25.082,-18.155) 108(25.082,-16.155) 109(25.082,-14.155) 110(25.082,-12.155) 111(25.082,-10.155) 112(25.082,-8.155) 113(25.082,-6.155) 114(25.082,-4.155) 115(25.082,-2.155) 116(25.082,-0.155) 117(25.082,1.845) 118(25.082,3.845) 119(25.082,5.845) 120(25.082,7.845) 121(25.082,9.845) 122(25.082,11.845) 123(25.082,13.845) 124(25.082,15.845) 125(25.082,17.845) 126(25.082,19.845) 127(25.082,21.845) 128(25.082,23.845) 129(25.082,25.845) 130(25.082,27.845) 131(25.082,29.845) 132(25.082,31.845)

## Via types
v1: diameter 0.508, hole 0.305, Top Layer to MidLayer1, 2032 vias
v2: diameter 0.508, hole 0.305, Top Layer to Bottom Layer, 143 vias
v3: diameter 0.508, hole 0.305, MidLayer2 to Bottom Layer, 38 vias

## Nets (pads, with @x,y where several pads share a name; then routed paths per layer and width w, separated by ;. In a path a pad name is that pad's centre, name@x,y a point inside that pad or via, vN(x,y) a via of type N, cw(c..) or ccw(c..) an arc to the next point about the centre after c; other vN are vias at no path point)
AOD0: *1.65 *2.1 | length 780.1
  Top Layer w0.762: v1(1018.281,398.526) 1019.566,399.811 1019.566,446.014 v1(1018.286,447.294) ; v1(1092.068,398.526) 1093.353,399.811 1093.353,402.597 1093.343,402.607 1093.343,403.599 1093.353,403.609 1093.353,446.014 v1(1092.073,447.294) ; v1(1165.728,398.526) 1167.115,399.913 1167.115,445.912 v1(1165.733,447.294) ; v1(1239.515,398.526) 1240.8,399.811 1240.8,402.597 1240.79,402.607 1240.79,403.599 1240.8,403.609 1240.8,446.014 v1(1239.52,447.294)
  MidLayer1 w0.762: v1(1018.281,398.526) v1(1022.858,398.526) v1(1027.557,398.526) v2(1032.129,398.526) v1(1036.696,398.526) v1(1041.273,398.526) v1(1045.972,398.526) v1(1050.544,398.526) v1(1055.111,398.526) v1(1059.688,398.526) v1(1064.387,398.526) v1(1068.959,398.526) v1(1073.526,398.526) v1(1078.103,398.526) v1(1082.802,398.526) v1(1087.374,398.526) v1(1092.068,398.526) v1(1096.645,398.526) v1(1101.344,398.526) v1(1105.916,398.526) v1(1110.483,398.526) v1(1115.06,398.526) v1(1119.759,398.526) v1(1124.331,398.526) v1(1128.898,398.526) v1(1133.475,398.526) v1(1138.174,398.526) v1(1142.746,398.526) v1(1147.313,398.526) v1(1151.89,398.526) v1(1156.589,398.526) v1(1161.161,398.526) v1(1165.728,398.526) v1(1170.305,398.526) v1(1175.004,398.526) v1(1179.576,398.526) v1(1184.143,398.526) v1(1188.72,398.526) v1(1193.419,398.526) v1(1197.991,398.526) v1(1202.558,398.526) v1(1207.135,398.526) v1(1211.834,398.526) v1(1216.406,398.526) v1(1220.973,398.526) v1(1225.55,398.526) v1(1230.249,398.526) v1(1234.821,398.526) v1(1239.515,398.526) v1(1244.092,398.526) v1(1248.791,398.526) v1(1253.363,398.526) v1(1257.93,398.526) v1(1262.507,398.526) v1(1267.206,398.526) v1(1271.778,398.526) v1(1276.345,398.526) v1(1280.922,398.526) v1(1285.621,398.526) v1(1290.193,398.526) v1(1294.76,398.526) v1(1299.337,398.526) v1(1304.036,398.526) v1(1308.608,398.526) ; v1(1018.286,447.294) v1(1022.863,447.294) v1(1027.562,447.294) v1(1032.134,447.294) v1(1036.701,447.294) v1(1041.278,447.294) v1(1045.977,447.294) v1(1050.549,447.294) v1(1055.116,447.294) v1(1059.693,447.294) v1(1064.392,447.294) v1(1068.964,447.294) v1(1073.531,447.294) v1(1078.108,447.294) v1(1082.807,447.294) v1(1087.379,447.294) v1(1092.073,447.294) v1(1096.65,447.294) v1(1101.349,447.294) v1(1105.921,447.294) v1(1110.488,447.294) v1(1115.065,447.294) v1(1119.764,447.294) v1(1124.336,447.294) v1(1128.903,447.294) v1(1133.48,447.294) v1(1138.179,447.294) v1(1142.751,447.294) v1(1147.318,447.294) v1(1151.895,447.294) v1(1156.594,447.294) v1(1161.166,447.294) v1(1165.733,447.294) v1(1170.31,447.294) v1(1175.009,447.294) v1(1179.581,447.294) v1(1184.148,447.294) v1(1188.725,447.294) v1(1193.424,447.294) v1(1197.996,447.294) v1(1202.563,447.294) v1(1207.14,447.294) v1(1211.839,447.294) v1(1216.411,447.294) v1(1220.978,447.294) v1(1225.555,447.294) v1(1230.254,447.294) v1(1234.826,447.294) v1(1239.52,447.294) v1(1244.097,447.294) v1(1248.796,447.294) v1(1253.368,447.294) v1(1257.935,447.294) v1(1262.512,447.294) v1(1267.211,447.294) v1(1271.783,447.294) v1(1276.35,447.294) v1(1280.927,447.294) v1(1285.626,447.294) v1(1290.198,447.294) v1(1294.765,447.294) v1(1299.342,447.294) v1(1304.041,447.294) v1(1308.613,447.294)